# Altium PCB Connected_Cube.PcbDoc (part 3 of 4)
Units mil, origin at the board's own origin, x right, y up, seen from the top; angles counter-clockwise.
Board outline 4960.63 x 3700.79 mil, 4 copper layers (Top Layer, GND, Power, Bottom Layer), stack 47.164 mil thick; 209 components, 203 nets, 946 pads, 737 vias.
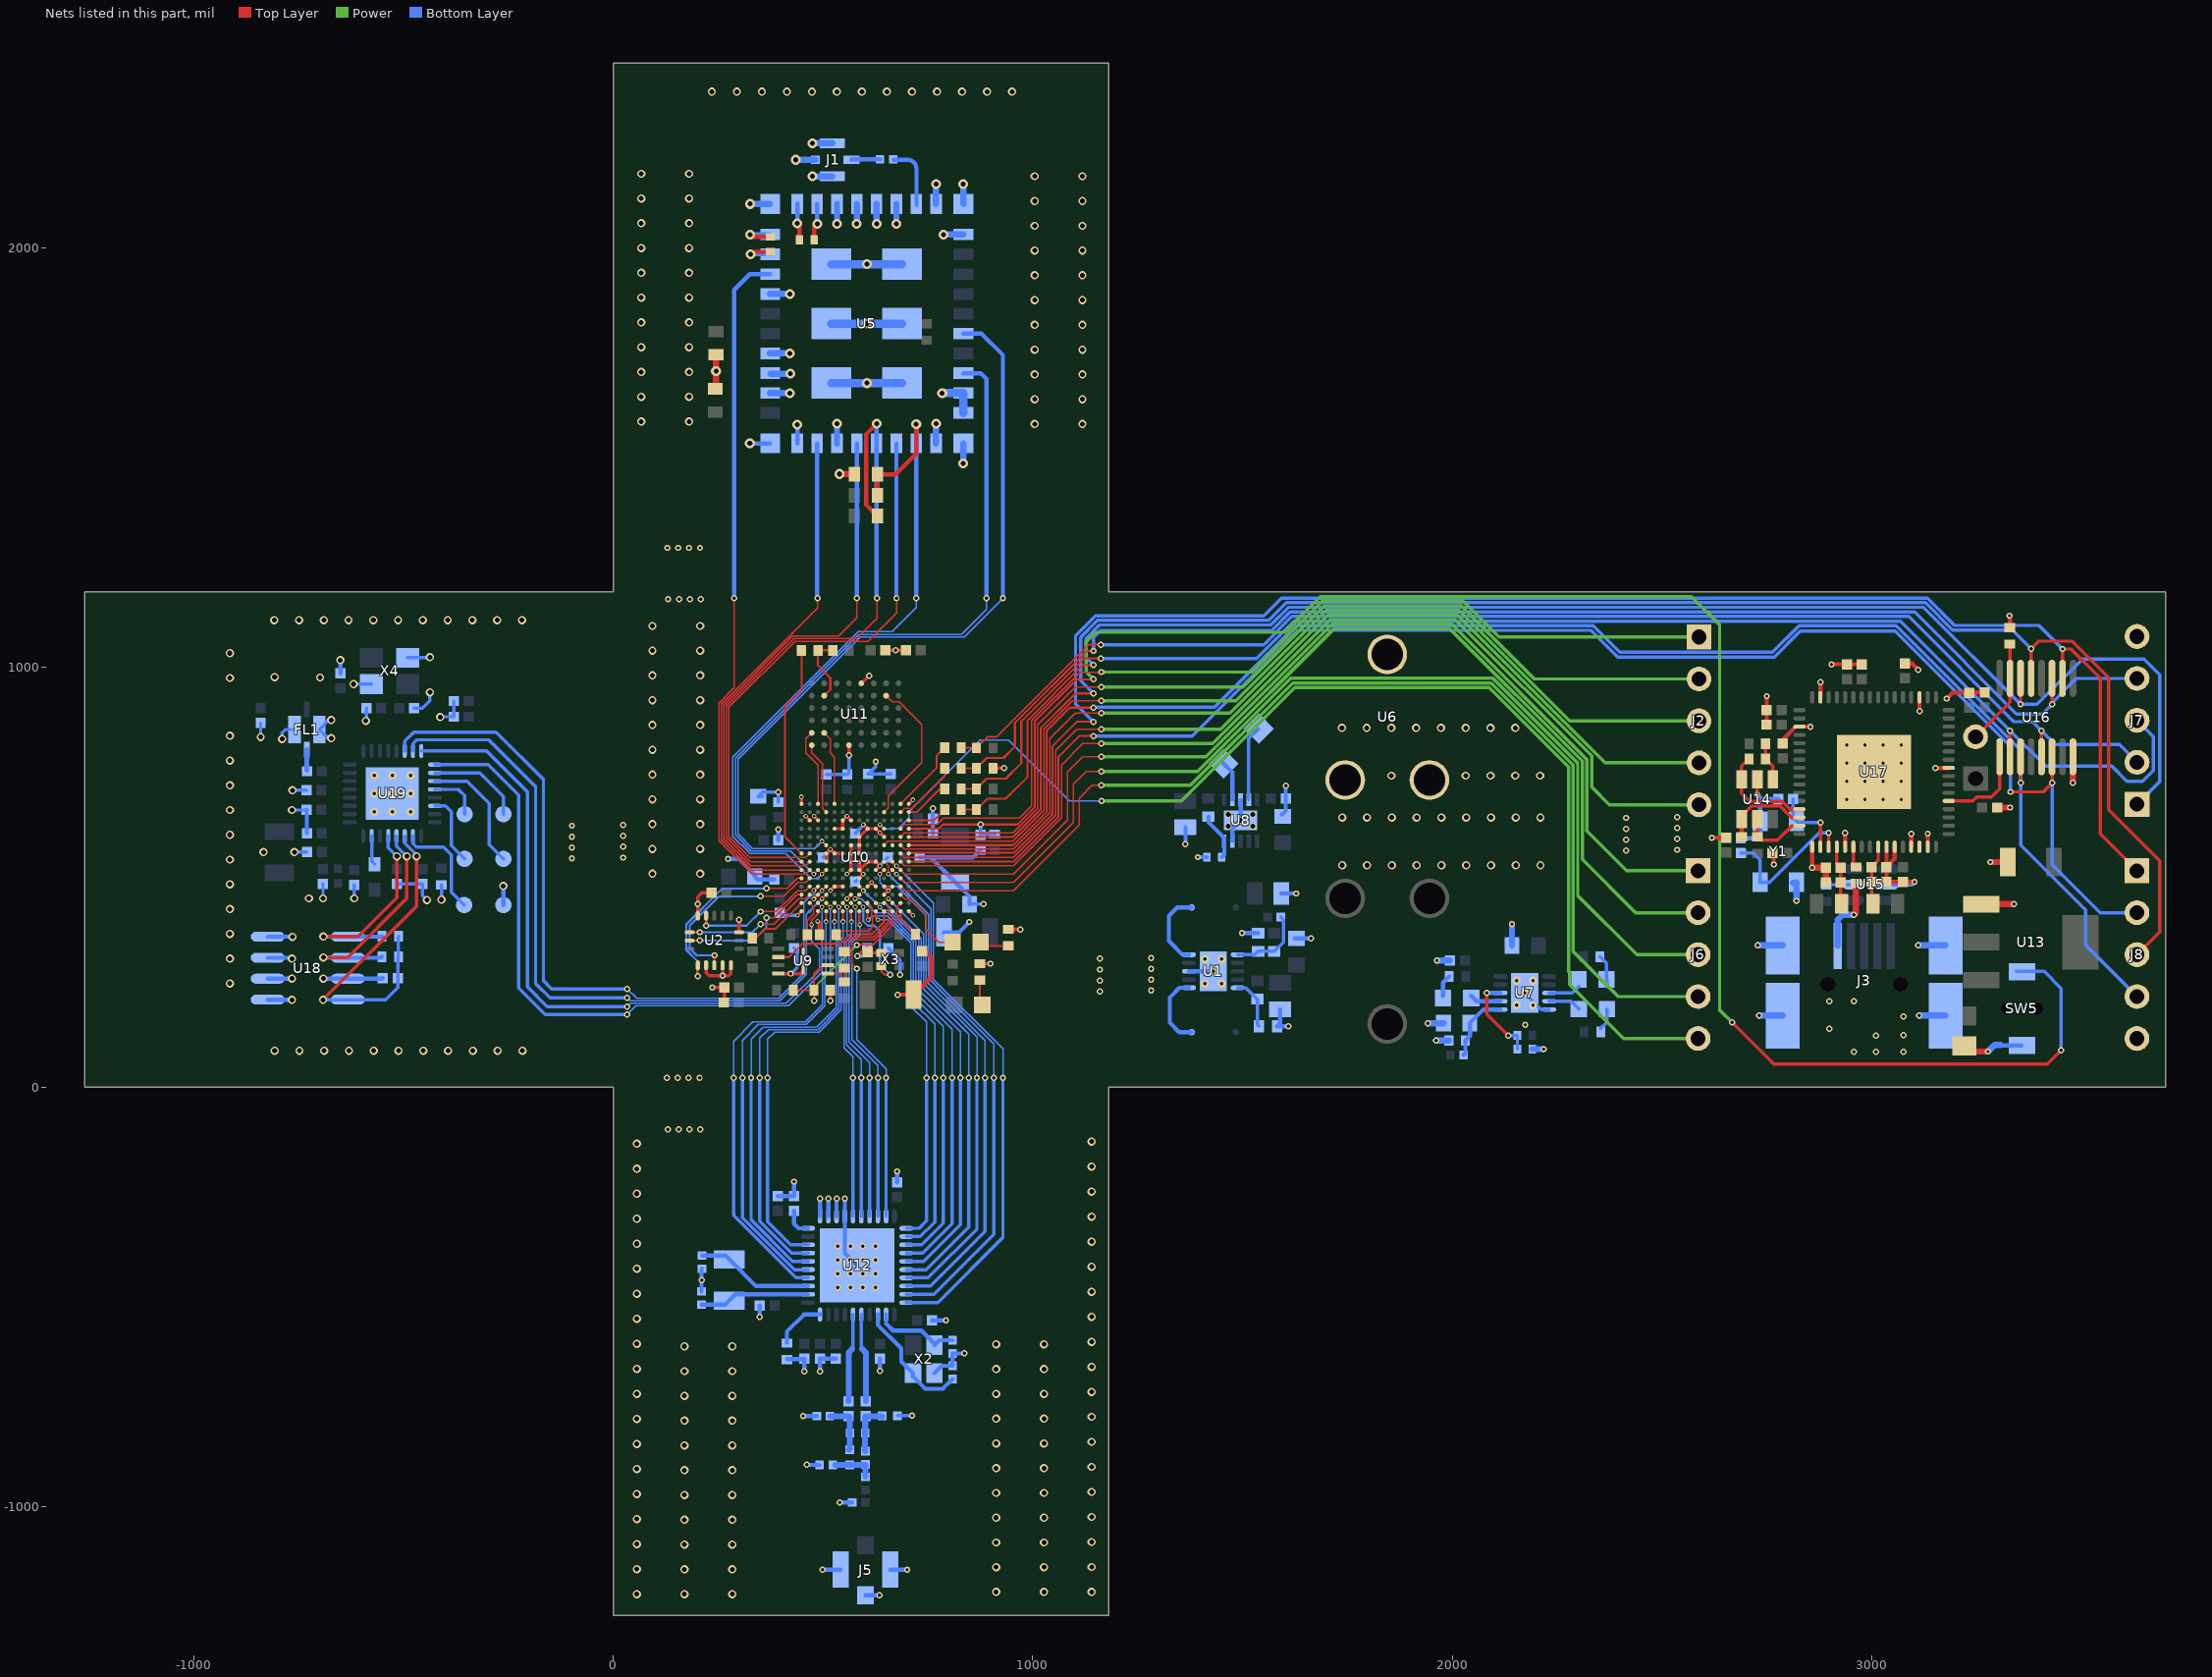
[diagram p5: the nets of this part, all layers, seen from the top]

## Via types
v1: diameter 15, hole 8, Top Layer to Bottom Layer, tented both sides, 313 vias
v2: diameter 19.68, hole 11.81, Top Layer to Bottom Layer, tented both sides, 269 vias
v3: diameter 11, hole 6, Top Layer to Bottom Layer, tented both sides, 78 vias
v4: diameter 23.62, hole 11.81, Top Layer to Bottom Layer, tented both sides, 37 vias
v5: diameter 19.68, hole 7.87, Top Layer to Bottom Layer, tented both sides, 35 vias
v6: diameter 15.75, hole 11.81, Top Layer to Bottom Layer, tented both sides, 5 vias

## Nets (pads, with @x,y where several pads share a name; then routed paths per layer and width w, separated by ;. In a path a pad name is that pad's centre, name@x,y a point inside that pad or via, vN(x,y) a via of type N, cw(c..) or ccw(c..) an arc to the next point about the centre after c; other vN are vias at no path point) (continued)
GND: C1.1 C3.1 C4.1 C5.2 C6.2 C7.1 C8.2 C9.2 C11.2 C12.1 C13.2 C14.1 C15.1 C16.1 C17.1 C18.1 C19.2 C20.1 C21.1 C22.2 C23.1 C24.1 C25.1 C26.1 C27.1 C28.2 C29.1 C30.1 C31.1 C32.1 C33.1 C34.1 C35.2 C36.1 C37.1 C38.1 C39.2 C40.1 C41.2 C42.1 C43.1 C44.1 C45.2 C46.1 C47.1 C48.1 C49.1 C50.1 C51.1 C52.1 C53.1 C54.1 C55.1 C56.1 C57.1 C58.1 C59.2 C61.1 C62.2 C63.2 C64.2 C65.2 C66.1 C67.1 C68.2 C69.2 C70.2 C71.2 C72.2 C73.2 C74.1 C75.2 C76.2 C77.2 C81.1 C82.1 C84.2 C86.1 C87.1 C88.1 C89.1 C91.1 C92.1 C93.1 C94.1 C95.1 C96.1 C97.1 C98.1 C99.1 C100.1 C101.2 C102.2 C103.1 C104.1 FL1.1 FL1.3 J1.2 J1.3 J1.4 J3.5 J3.6 J3.7 J3.8 J3.9 J5.2 J5.3 J5.4 J7.5 J8.5 L6.1 R3.1 R4.1 R8.1 R10.2 R12.1 R14.2 R15.2 R22.2 R23.1 R30.2 R35.2 R36.2 R40.2 R53.2 SW5.2 TP6.1 U1.8 U1.11 U2.5 U2.10 U2.12 U2.13 U2.16 U5.1 U5.9 U5.10 U5.11 U5.16 U5.18 U5.20 U5.21 U5.22 U5.25 U5.31 U5.32 U5.33 U5.34 U5.36 U5.37 U5.38 U5.39 U5.40 U5.41 U5.42 U5.43 U5.44 U5.45 U5.46 U6.1 U6.2 U6.3 U7.5 U7.11 U8.3 U8.9 U8.11 U9.4 U9.9 U10.A1 U10.A14 U10.C2 U10.C3 U10.C6 U10.C7 U10.D5 U10.D6 U10.D9 U10.D10 U10.E8 U10.E11 U10.F7 U10.F8 U10.G4 U10.G5 U10.G6 U10.G7 U10.G8 U10.H4 U10.H7 U10.H8 U10.H9 U10.H10 U10.J7 U10.J8 U10.J10 U10.K8 U10.L3 U10.L5 U10.L6 U10.L9 U10.L10 U10.L11 U10.L12 U10.M3 U10.M7 U10.M11 U10.P1 U10.P14 U11.D1 U11.E6 U12.1 U12.2 U12.3 U12.4 U12.41 U13.1 U14.2 U15.2 U16.8 U17.1 U17.5 U17.10 U17.11 U17.13 U17.15 U17.25 U17.35 U17.47 U17.51 U17.65 U18.1 U18.2 U18.3 U18.4 U18.7 U19.33 X2.2 X3.2 X4.2 X4.4 Y1.2 Y1.4 | length 9572
  Top Layer w5: v3(448.82,691.93) v3(448.82,691.93) ; U10.H8@585.81,538.17 U10.H8@586.65,537.32 ; U10.G8@585.81,556.17 U10.G8@586.65,557.01
  Top Layer w8: U2.5@201.77,408.46 v1(201.77,436.02) 201.77,453.74 211.61,463.58 C7.1@234.25,463.58 ; U2.10@221.46,290.35 221.46,272.64 228.35,265.75 v1(260.83,265.75) ; v1(236.22,237.2) C6.2@264.76,237.2 264.76,202.76 C5.2@263.78,201.77 ; U2.12@260.83,290.35 v1(260.83,265.75) ; U2.13@280.51,290.35 280.51,270.67 275.59,265.75 v1(260.83,265.75) ; U2.16@300.2,369.09 v1(300.2,398.62) ; U9.4@393.7,270.67 v1(423.23,270.67) 445.87,270.67 452.76,277.56 U9.9@452.76,300.2 ; v3(439.01,409.37) U10.P1@448.86,419.21 ; U10.A1@448.86,675.12 v3(448.82,691.93) ; v3(458.7,645.59) U10.C2@468.54,635.75 ; v3@478.38,448.74 U10.M3@488.23,458.58 ; v3@478.38,468.42 U10.L3@488.23,478.27 ; v3@478.38,645.59 U10.C3@488.23,635.75 ; U10.H4@507.91,537.32 U10.G4@507.91,557.01 v3(517.75,566.85) U10.G5@527.6,557.01 U10.G6@547.28,557.01 ; v1(517.72,205.71) R23.1@517.72,231.3 ; v3(517.75,468.42) U10.L5@527.6,478.27 U10.L6@547.28,478.27 ; U10.D5@527.6,616.06 U10.D6@547.28,616.06 U10.C6@547.28,635.75 v3(557.12,645.59) U10.C7@566.97,635.75 ; v3(557.12,448.74) U10.M7@566.97,458.58 ; v3(557.12,507.79) U10.J7@566.97,517.64 U10.H7@566.97,537.32 U10.G7@566.97,557.01 U10.F7@566.97,576.69 ; v1(562.01,791.34) U11.D1@562.01,814.96 ; v1(581.69,312.01) 591.54,321.85 C19.2@606.3,321.85 608.27,319.88 X3.2@638.78,319.88 ; U10.K8@586.65,497.95 v3(596.5,507.79) U10.J8@586.65,517.64 ; U10.H8@586.65,537.32 U10.J8@586.65,517.64 ; U10.G8@586.65,557.01 U10.F8@586.65,576.69 U10.E8@586.65,596.38 596.5,606.22 U10.D9@606.34,616.06 U10.D10@626.02,616.06 U10.E11@645.71,596.38 ; U11.E6@591.54,962.6 592.52,962.6 v1(610.24,980.31) ; v3(596.46,625.98) U10.D9@606.34,616.06 ; U10.L9@606.34,478.27 606.52,478.27 v3(616.25,488) U10.L10@625.98,478.27 ; U10.J10@626.02,517.64 626.46,517.64 v3(635.83,527) 626.02,536.8 U10.H10@626.02,537.32 U10.H9@606.34,537.32 U10.J8@586.65,517.64 ; U10.M11@645.71,458.58 v3@655.55,468.42 ; U10.L11@645.71,478.27 v3@655.55,468.42 ; C47.1@648.62,1041.34 v1(673.23,1041.34) C46.1@697.83,1041.34 ; U10.L12@665.39,478.27 v3@655.55,468.42 ; U10.P14@704.76,419.21 v3(714.61,409.37) ; U10.A14@704.76,675.12 v3(714.61,684.96) ; R36.2@874.02,294.13 v1(899.6,294.13) ; R30.2@905.52,760.16 v1(932.09,760.16) ; R35.2@940.94,376.97 R35.2@941.93,375.98 ; v1(2727.36,696.85) U14.2@2727.36,733.27
  Top Layer w10: v3(487.2,395) 492.13,390.08 R22.2@492.13,363.19 ; v1@678.15,220.47 C41.2@716.54,220.47 758.86,262.8 758.86,308.07 743.11,323.82 C20.1@736.22,323.82 ; R35.2@941.93,375.98 v1(970.47,375.98) ; v1(2619.09,594.49) C59.2@2653.54,594.49 ; C61.1@2750,864.17 C74.1@2750,898.62 v1(2750,932.09) ; v1(2766.73,530.51) C76.2@2766.73,558.07 ; C73.2@2788.39,818.9 2788.39,828.31 2819.33,859.25 U17.51@2827.76,859.25 v1(2854.33,859.25) ; v1(2858.27,522.64) U17.1@2858.27,572.83 ; U17.47@2877.95,929.13 v1(2877.95,965.55) ; v1(2904.53,1007.87) C68.2@2940.94,1007.87 C71.2@2976.38,1007.87 ; U17.5@2937.01,572.83 v1(2937.01,606.3) ; U17.10@3035.43,572.83 C67.1@3035.43,524.61 ; U17.11@3055.12,572.83 3055.12,544.29 C67.1@3035.43,524.61 ; C75.2@3079.72,1009.84 3096.46,1009.84 v1(3111.22,995.08) ; U17.13@3094.49,572.83 v1(3094.49,603.35) ; v1(3102.36,489.17) C77.2@3074.8,489.17 C66.1@3035.43,489.17 C67.1@3035.43,524.61 ; v1(3114.17,896.65) U17.35@3114.17,929.13 ; U17.15@3133.86,572.83 v1(3133.86,604.33) ; v1(3152.56,760.83) U17.25@3184.06,760.83 ; v1(3179.13,926.18) 3192.91,939.96 C69.2@3233.27,939.96 3234.25,940.94 C70.2@3269.68,940.94 ; v1(3328.74,1124.02) 3329.72,1123.03 R14.2@3329.72,1095.47
  Top Layer w15: C86.1@243.11,1664.37 245.08,1666.34 v4(245.08,1706.69) ; v4@245.08,1707.68 C87.1@245.08,1746.06 ; v4(539.37,1461.61) C88.1@573.82,1461.61 ; v1(2858.27,522.64) C65.2@2890.75,522.64 C64.2@2890.75,488.19 ; v1(2957.68,410.43) 2962.6,415.35 R15.2@2962.6,485.24 ; C57.1@3221.46,98.43 3235.24,84.65 v1(3277.56,84.65) ; U13.1@3261.81,436.02 v1(3339.57,436.02) ; v1(3283.46,536.42) C58.1@3324.8,536.42 ; C72.2@3299.21,666.34 v1(3329.72,666.34) ; v1(3480.22,725.3) U16.8@3480.22,787.4
  Bottom Layer w7.87: v2(-840.55,834.65) C91.1@-840.55,867.13 ; v2(-789.37,829.72) -789.37,844.49 -781.5,852.36 FL1.3@-759.84,852.36 ; v2(-765.75,660.43) C97.1@-730.31,660.43 ; v2(-764.76,707.68) C98.1@-730.31,707.68 ; v2@-761.81,562.01 v2(-759.84,560.04) C104.1@-730.31,560.04 ; C100.1@-692.91,484.25 -691.93,483.27 v2(-691.93,449.8) ; v2(-672.24,831.69) -680.12,831.69 FL1.1@-700.79,852.36 -678.15,875 v2(-672.24,875) ; v2(-619.09,960.63) X4.2@-576.77,960.63 ; v2(-617.13,449.8) C92.1@-617.13,482.28 ; v2(-589.57,873.03) -588.58,874.02 C102.2@-588.58,903.54 ; C95.1@-515.75,484.25 C96.1@-454.72,484.25 -454.72,456.69 v2(-443.9,445.87) ; X4.4@-490.16,1023.62 -437.99,1023.62 v2(-437.01,1024.61) ; C101.2@-474.41,903.54 -454.72,903.54 -437.01,921.26 v2(-437.01,940.94) ; v2@-411.42,882.87 C93.1@-379.92,882.87 C94.1@-379.92,920.28 ; v2(-409.45,446.85) R53.2@-409.45,482.28 ; L6.1@677.66,-783.46 v1(712.6,-783.46)
  Bottom Layer w8: C40.1@356.3,692.91 C40.1@345.47,692.91 355.32,702.76 v1(393.7,702.76) C44.1@393.7,679.13 ; C37.1@397.64,415.35 403.62,409.37 v3(439.01,409.37) ; v1(423.23,270.67) 424.05,270.67 437.73,284.35 437.73,325.07 C31.1@431.1,331.69 ; C26.1@500,547.24 517.75,565 v3(517.75,566.85) ; C38.1@507.87,745.08 C39.2@558.07,745.08 562.01,749.02 v1(562.01,791.34) ; C27.1@576.77,490.16 578.86,490.16 v3(596.5,507.79) ; C25.1@576.77,604.33 596.46,624.02 v3(596.46,625.98) ; v1(581.69,312.01) 593.5,312.01 605.32,323.82 C23.1@605.32,331.69 C23.1@605.32,333.66 ; v1(626,775.59) 626,763.8 C33.1@608.27,746.06 C32.1@661.42,746.06 ; v3(635.83,527) 635.83,528.54 C28.2@654.53,547.24 ; C22.2@655.51,331.69 684.06,303.15 v1(684.06,267.72) ; C34.1@849.41,436.02 v1(882.87,436.02) ; v5(2173.23,224.41) U7.11@2192.91,204.72 ; v5(2192.91,194.88) U7.11@2192.91,204.72 ; U7.5@2231.3,185.04 2212.6,185.04 U7.11@2192.91,204.72
  Bottom Layer w10: U18.1@-823.82,208.46 -766.53,208.46 v2(-765.75,207.68) ; U18.2@-823.82,258.46 -766.14,258.46 v2(-765.75,258.86) ; U18.3@-823.82,308.46 -768.11,308.46 v2(-765.75,306.1) ; U18.4@-823.82,358.46 -764.96,358.46 v2(-764.76,358.27) ; C97.1@-731.3,661.42 -730.31,660.43 C103.1@-730.31,605.31 ; v2@-690.55,258.46 U18.7@-632.87,258.46 -550.59,258.46 C89.1@-549.21,259.84 ; C99.1@-650.59,986.22 v2(-650.59,1017.72) ; TP6.1@-261.81,434.06 v2(-261.81,479.33) ; C16.1@210.63,-487.2 v1(210.63,-459.65) 210.63,-434.06 C15.1@211.61,-433.07 ; v1(273.62,544.29) 299.21,544.29 337.6,505.91 C21.1@337.6,501.97 344.49,495.08 C42.1@383.86,495.08 ; v4(325.79,1534.45) U5.45@374.02,1534.45 ; v1(349.41,-548.23) C51.1@349.41,-520.67 ; C48.1@392.72,-259.84 C56.1@431.1,-259.84 v1(431.1,-225.39) ; C43.1@393.7,588.58 v1(393.7,614.17) ; R40.2@414.37,-648.62 453.74,-648.62 455.71,-646.65 v1(455.71,-678.15) v1@455.71,-679.13 ; U5.18@438.98,1534.45 v4@438.98,1577.76 ; v1(452.76,-784.45) C84.2@485.24,-784.45 ; v1(461.61,-900.59) C81.1@492.13,-900.59 ; v1(493.11,-678.15) 493.11,-646.65 494.09,-647.64 C53.1@530.51,-647.64 ; U12.1@493.11,-308.07 v1(493.11,-265.75) ; v1(499.02,-1150.59) J5.2@542.32,-1150.59 ; U12.2@512.8,-308.07 v1(512.8,-265.75) ; U12.3@532.48,-308.07 v1(532.48,-265.75) ; v1(540.35,-990.16) C82.1@569.88,-990.16 ; v1(552.17,-265.75) U12.4@552.17,-308.07 552.17,-395.67 U12.41@581.69,-425.2 ; J5.3@601.38,-1211.61 v1(634.84,-1211.61) ; v1(635.83,-676.18) C55.1@635.83,-647.64 ; J5.4@660.43,-1150.59 v1(700.79,-1150.59) ; C49.1@677.17,-227.36 v1(677.17,-200.79) ; C24.1@730.31,547.24 756.89,547.24 ; C50.1@759.84,-556.1 v1(793.31,-556.1) ; C36.1@761.81,604.33 v1(761.81,664.37) ; X2.2@765.75,-682.09 783.46,-664.37 C18.1@809.06,-664.37 C17.1@809.06,-634.84 v1(837.6,-634.84) ; C30.1@788.39,369.09 824.8,369.09 v1@849.41,393.7 ; C34.1@849.41,436.02 849.41,454.72 C29.1@814.96,489.17 756.89,547.24 ; C45.2@875.98,565.94 857.28,547.24 756.89,547.24 ; v1(1364.17,578.74) C14.1@1364.17,619.09 ; U1.8@1372.56,276.1 v5(1430.63,276.1) ; v1@1394.69,548.23 R12.1@1415.35,548.23 ; U8.9@1476.38,586.61 1476.38,616.14 1496.06,635.83 U8.3@1496.06,685.04 ; v1(1499.02,367.13) R4.1@1537.56,367.13 ; C1.1@1589.57,185.04 1589.57,151.57 R3.1@1582.68,144.68 v1(1609.25,144.68) ; C4.1@1592.52,461.61 v1(1627.95,461.61) ; C12.1@1594.49,649.61 1603.35,658.46 C13.2@1603.35,687.99 v1(1603.35,718.5) ; C3.1@1624.09,354.33 C3.1@1629.09,354.33 v1(1663.46,354.33) ; C62.2@2687.99,593.5 2720.47,593.5 2734.25,607.28 Y1.4@2734.25,633.86 2734.25,689.96 ; v1(2727.36,696.85) 2734.25,689.96 ; C63.2@2777.56,687.01 2737.2,687.01 2734.25,689.96 ; U15.2@3039.37,482.68 3095.87,482.68 v1(3102.36,489.17) ; 3308.07,100.39 3309.06,99.41 SW5.2@3357.28,99.41
  Bottom Layer w15: v4(326.77,2105.32) U5.46@374.02,2105.32 ; U5.20@374.02,1654.53 v4(421.26,1654.53) ; U5.22@374.02,1749.02 v4(421.26,1749.02) ; U5.25@374.02,1890.75 v4(421.26,1890.75) ; U5.21@375,1700.79 v4(422.24,1700.79) ; v4(435.04,2210.63) J1.4@482.28,2210.63 ; v4(475.39,2171.26) J1.2@522.64,2171.26 ; v4(475.39,2250) J1.3@522.64,2250 ; U5.16@533.46,1534.45 v4(533.46,1581.69) ; v4(533.46,2058.07) U5.31@533.46,2105.32 ; v4(580.71,2058.07) U5.32@580.71,2105.32 ; v4(627.95,2058.07) U5.33@627.95,2105.32 ; v4(675.2,2058.07) U5.34@675.2,2105.32 ; U5.11@769.69,1534.45 v4(769.68,1581.69) ; U5.36@769.69,2105.32 v4(769.68,2152.56) ; v4(787.4,2032.48) U5.1@834.65,2032.48 ; v4(834.65,1487.2) U5.44@834.65,1534.45 ; U5.43@834.65,2105.32 v4(834.65,2152.56) ; v1(1941.93,152.32) C11.2@1979.33,152.32 ; v1(1961.61,110.98) R8.1@1992.13,110.98 ; v1(1963.58,302.17) C8.2@1995.08,302.17 ; C9.2@2142.72,337.6 v1(2142.72,388.78) ; R10.2@2190.94,90.55 v1(2218.5,90.55) ; v1(2728.35,337.6) J3.8@2788.38,337.6 ; v1(2732.28,170.28) J3.9@2788.38,170.28 ; Y1.2@2812.99,487.2 Y1.2@2813.98,486.22 ; v1(2820.87,443.9) Y1.2@2820.87,488.19 ; J3.5@2919.29,336.61 2919.29,398.62 2931.1,410.43 v1(2957.68,410.43) ; v1(3111.22,337.6) J3.6@3176.18,337.6 ; v1(3113.19,170.28) J3.7@3176.18,170.28 ; v1(3277.56,84.65) 3293.31,100.39 3308.07,100.39
  Bottom Layer w20: U5.42@519.69,1678.15 U5.39@688.98,1678.15 ; U5.41@519.69,1819.88 U5.38@688.98,1819.88 ; U5.40@519.69,1961.61 U5.37@688.98,1961.61 ; v4(784.45,1654.53) U5.9@834.65,1654.53 U5.10@834.65,1607.28
  other v1: 535.43,-477.36 565.29,-477.36 595.14,-477.36 625,-477.36 535.43,-444.55 565.29,-444.55 595.14,-444.55 625,-444.55 535.43,-411.75 564.96,-411.75 595.47,-411.75 625,-411.75 535.43,-378.94 565.29,-378.94 595.14,-378.94 625,-378.94 129.92,-100.39 155.9,-100.39 181.89,-100.39 207.87,-100.39 127.95,21.65 153.94,21.65 179.92,21.65 205.9,21.65 2957.68,83.66 3010.83,83.66 3075.79,83.66 3010.83,123.03 3075.79,124.02 2899.61,138.78 2174.21,148.62 3075.79,168.31 2899.61,204.72 2957.68,204.72 678.15,219.49 1160.43,228.15 1282.48,230.12 1160.43,254.14 1282.48,256.1 1160.43,280.12 1282.48,282.09 1160.43,306.1 1282.48,308.07 848.43,393.7 -98.43,545.08 23.62,547.05 1393.7,548.23 2414.37,563.78 2536.42,565.75 -98.43,571.06 23.62,573.03 2414.37,589.77 2536.42,591.73 -98.43,597.05 23.62,599.02 2414.37,615.75 2536.42,617.72 -98.43,623.03 23.62,625 2414.37,641.73 2536.42,643.7 130.91,1163.39 156.89,1163.39 182.87,1163.39 208.86,1163.39 128.94,1285.43 154.92,1285.43 180.9,1285.43 206.89,1285.43
  other v2: 56.1,-1208.66 169.95,-1208.66 283.79,-1208.66 913.06,-1203.74 1026.9,-1203.74 1140.75,-1203.74 56.1,-1149 169.95,-1149.61 283.79,-1149.61 913.06,-1144.69 1026.9,-1144.69 1140.75,-1144.08 169.95,-1090.55 283.79,-1090.55 56.1,-1089.35 913.06,-1085.63 1026.9,-1085.63 1140.75,-1084.43 169.95,-1031.5 283.79,-1031.5 56.1,-1029.69 913.06,-1026.57 1026.9,-1026.57 1140.75,-1024.77 169.95,-972.44 283.79,-972.44 56.1,-970.04 913.06,-967.52 1026.9,-967.52 1140.75,-965.11 169.95,-913.39 283.79,-913.39 56.1,-910.38 913.06,-908.46 1026.9,-908.46 1140.75,-905.46 169.95,-854.33 283.79,-854.33 56.1,-850.72 913.06,-849.41 1026.9,-849.41 1140.75,-845.8 169.95,-795.28 283.79,-795.28 56.1,-791.07 913.06,-790.35 1026.9,-790.35 1140.75,-786.14 169.95,-736.22 283.79,-736.22 56.1,-731.41 913.06,-731.3 1026.9,-731.3 1140.75,-726.49 169.95,-677.17 283.79,-677.17 913.06,-672.24 1026.9,-672.24 56.1,-671.75 1140.75,-666.83 169.95,-618.11 283.79,-618.11 913.06,-613.19 1026.9,-613.19 56.1,-612.1 1140.75,-607.17 56.1,-552.44 1140.75,-547.52 56.1,-492.78 1140.75,-487.86 56.1,-433.13 1140.75,-428.2 56.1,-373.47 1140.75,-368.55 56.1,-313.81 1140.75,-308.89 56.1,-254.16 1140.75,-249.23 56.1,-194.5 1140.75,-189.58 56.1,-134.84 1140.75,-129.92 -807.09,86.61 -748.03,86.61 -688.98,86.61 -629.92,86.61 -570.87,86.61 -511.81,86.61 -452.76,86.61 -393.7,86.61 -334.65,86.61 -275.59,86.61 -216.54,86.61 -913.7,247.05 -690.94,258.86 -913.7,306.1 -913.7,365.16 -913.7,424.21 -725.39,449.8 -913.7,483.27 93.5,508.86 207.35,508.86 1738.19,528.87 1797.24,528.87 1856.3,528.87 1915.35,528.87 1974.41,528.87 2033.46,528.87 2092.52,528.87 2151.57,528.87 2210.63,528.87 -913.7,542.32 -833.66,560.04 93.5,567.91 207.35,567.91 -913.7,601.38 93.5,626.97 207.35,626.97 1738.19,642.72 1797.24,642.72 1856.3,642.72 1915.35,642.72 1974.41,642.72 2033.46,642.72 2092.52,642.72 2151.57,642.72 2210.63,642.72 -913.7,660.43 93.5,686.02 207.35,686.02 -913.7,719.49 1855.31,742.45 2032.48,742.45 2091.54,742.45 2150.59,742.45 2209.65,742.45 93.5,745.08 207.35,745.08 -913.7,778.54 93.5,804.13 207.35,804.13 -913.7,837.6 1737.2,856.3 1796.26,856.3 1855.31,856.3 1914.37,856.3 1973.43,856.3 2032.48,856.3 2091.54,856.3 2150.59,856.3 93.5,863.19 207.35,863.19 -412.4,881.89 93.5,922.24 207.35,922.24 -913.7,975.39 -698.82,976.38 -807.09,977.36 93.5,981.3 207.35,981.3 -913.7,1034.45 93.5,1040.35 207.35,1040.35 93.5,1099.41 207.35,1099.41 -808.07,1113.19 -749.02,1113.19 -689.96,1113.19 -630.91,1113.19 -571.85,1113.19 -512.8,1113.19 -453.74,1113.19 -394.68,1113.19 -335.63,1113.19 -276.57,1113.19 -217.52,1113.19 1004.88,1580.8 1118.72,1580.8 66.89,1586.7 180.73,1586.7 1004.88,1639.85 1118.72,1639.85 66.89,1645.76 180.73,1645.76 1004.88,1698.91 1118.72,1698.91 66.89,1704.81 180.73,1704.81 1004.88,1757.96 1118.72,1757.96 66.89,1763.87 180.73,1763.87 1004.88,1817.02 1118.72,1817.02 66.89,1822.92 180.73,1822.92 1004.88,1876.07 1118.72,1876.07 66.89,1881.98 180.73,1881.98 1004.88,1935.13 1118.72,1935.13 66.89,1941.03 180.73,1941.03 1004.88,1994.18 1118.72,1994.18 66.89,2000.09 180.73,2000.09 1004.88,2053.24 1118.72,2053.24 66.89,2059.14 180.73,2059.14 1004.88,2112.29 1118.72,2112.29 66.89,2118.2 180.73,2118.2 1004.88,2171.35 1118.72,2171.35 66.89,2177.25 180.73,2177.25 235.07,2373.03 294.73,2373.03 354.39,2373.03 414.04,2373.03 473.7,2373.03 533.36,2373.03 593.01,2373.03 652.67,2373.03 712.33,2373.03 771.98,2373.03 831.64,2373.03 891.29,2373.03 950.95,2373.03
  other v3: 478.38,448.5 655.55,468 478.38,468.5 635.79,606.34 479,645.59
  other v4: 438.98,1578.74 605.32,1678.15 605.32,1819.88 605.32,1961.61
  other v5: 2153.54,194.88 1410.94,246.57 1450.31,246.57 2153.54,253.94 2192.91,253.94 1410.94,305.63 1450.31,305.63 -569.88,656.5 -526.58,656.5 -483.27,656.5 2940.95,686.02 2984.25,686.02 3027.56,686.02 3070.87,686.02 -569.88,699.8 -526.58,699.8 -483.27,699.8 2940.95,729.33 2984.25,729.33 3027.56,729.33 3070.87,729.33 -569.88,743.11 -526.58,743.11 -483.27,743.11 2940.95,772.64 2984.25,772.64 3027.56,772.64 3070.87,772.64 2940.95,815.94 2984.25,815.94 3027.56,815.94 3070.87,815.94
  other v6: 1466.04,622.05 1525.1,622.05 1495.57,635.83 1466.04,649.61 1525.1,649.61
HARD_TCK: J7.4 R30.1 R31.1 U16.11 | length 3209.1
  Top Layer w5: R31.1@829.73,760.16 R30.1@866.14,760.16 890.43,784.45 930.12,784.45 957.68,812.01 957.68,868.01 1129.43,1039.76 v1(1144.68,1039.76)
  Top Layer w8: v1(3430.22,912.3) U16.11@3430.22,974.41
  Bottom Layer w8: v1(1144.68,1039.76) 1144.68,1071.85 1161.42,1088.58 1569.51,1088.58 1613.66,1132.74 3102.5,1132.74 3345.47,889.76 3407.68,889.76 v1(3430.22,912.3) 3430.22,916.27 3488.16,974.21 J7.4@3632.87,974.21
HARD_TDI: J7.2 R29.1 R32.1 U16.5 | length 3138.5
  Top Layer w5: R32.1@829.72,809.53 867.13,809.53 892.24,834.65 913,834.65 1132.88,1054.53 v1(1162.4,1054.53)
  Top Layer w8: U16.5@3405.22,787.4 v1(3405.22,849.51)
  Bottom Layer w8: v1(1162.4,1054.53) 1551.01,1054.53 1618.22,1121.74 3088.89,1121.74 3339.57,871.06 3383.66,871.06 v1(3405.22,849.51) 3438.19,816.54 3590.55,816.54 J7.2@3632.87,774.21
HARD_TDO: J7.1 R28.1 R33.1 U16.14 | length 3748
  Top Layer w5: R33.1@829.73,661.42 R28.1@866.14,661.42 891.73,687.01 935.04,687.01 987.85,739.82 987.85,874.18 1119.63,1005.96 v1(1144.68,1005.96)
  Top Layer w8: v1(3355.22,912.3) U16.14@3355.22,974.41
  Bottom Layer w8: v1(1144.68,1005.96) 1126.97,1023.68 1126.97,1069.69 1159.05,1101.77 1567.14,1101.77 1609.11,1143.74 3123.78,1143.74 v1(3355.22,912.3) 3394.59,912.3 3502.95,1020.67 3649.61,1020.67 3687.01,983.27 3687.01,728.35 J7.1@3632.87,674.21
HARD_TMS: J7.3 R27.1 R34.1 U16.2 | length 3431.9
  Top Layer w5: R34.1@829.73,710.79 R27.1@866.14,710.79 890.59,735.24 936.02,735.24 973.08,772.3 973.08,872.1 1122.89,1021.91 v1(1162.4,1021.91)
  Top Layer w8: U16.2@3330.22,787.4 v1(3330.22,849.9)
  Bottom Layer w8: v1(1162.4,1021.91) 1533.95,1021.91 1622.78,1110.74 3069.38,1110.74 v1(3330.22,849.9) 3415.35,764.76 3572.83,764.76 3608.27,729.33 3645.67,729.33 3671.26,754.92 3671.26,835.83 J7.3@3632.87,874.21
INT1: U2.11 U10.K2 | length 476.8
  Top Layer w3: v1(351.38,454.72) 406.5,454.72 439.96,488.19 458.78,488.19 U10.K2@468.54,497.95
  Top Layer w5: U2.11@241.14,290.35 v1(241.14,313.98)
  Bottom Layer w5: v1(241.14,313.98) 198.82,313.98 182.1,330.69 182.1,384.37 252.46,454.72 v1(351.38,454.72)
INT2: U2.9 U10.K1 | length 480.4
  Top Layer w3: v1(365.16,473.43) 414.37,473.43 438.9,497.95 U10.K1@448.86,497.95
  Top Layer w5: v1(201.77,264.76) U2.9@201.77,290.35
  Bottom Layer w5: v1(201.77,264.76) 201.77,299.21 174.1,326.88 174.1,387.69 259.84,473.43 v1(365.16,473.43)
IO0: J6.4 U10.L13 | length 2717.9
  Top Layer w3: U10.L13@685.08,478.27 694.84,468.5 954.53,468.5 1110.57,624.55 1110.57,688.33 1141.73,719.49 v1(1163.39,719.49)
  Top Layer w5: U10.L13@685.08,477.88 U10.L13@685.08,478.27
  Power w8: v1(1163.39,719.49) 1376.18,719.49 1620.1,963.41 2092.5,963.41 2288.56,767.35 2288.56,323.45 2396.26,215.75 J6.4@2586.52,215.75
IO1: J6.1 U10.H13 | length 2560.9
  Top Layer w3: U10.H13@685.08,537.32 694.84,527.56 954.19,527.56 1068.57,641.95 1068.57,767.72 1119.76,818.9 v1(1163.39,818.9)
  Power w8: v1(1163.39,818.9) 1428.92,818.9 1713.31,1103.29 1999.29,1103.29 2321.56,781.02 2321.56,610.53 2416.34,515.75 J6.1@2586.52,515.75
IO2: J6.3 U10.K13 | length 2618
  Top Layer w3: U10.K13@685.08,497.95 694.84,488.19 954.41,488.19 1096.57,630.35 1096.57,721.57 1126.97,751.97 v1(1163.39,751.97)
  Power w8: v1(1163.39,751.97) 1393.1,751.97 1615.54,974.41 2097.06,974.41 2299.56,771.91 2299.56,456.35 2440.16,315.75 J6.3@2586.52,315.75
IO3: U10.H12 U12.20 | length 1299.6
  Top Layer w5: U10.H12@665.39,537.32 665.39,536.8 v3(675.2,527)
  Bottom Layer w3: v3(675.2,527) 763.78,438.42 763.78,255.91 929.13,90.55 v1(929.13,21.61)
  Bottom Layer w8: U12.20@698.82,-513.78 773.62,-513.78 929.13,-358.27 v1(929.13,21.61)
IO4: U10.N12 U12.16 | length 1066.9
  Top Layer w3: U10.N12@665.39,438.9 U10.N12@665.9,438.9
  Top Layer w5: v3(655.55,448.74) U10.N12@665.39,438.9
  Bottom Layer w3: v3(655.55,448.74) 739.78,364.51 739.78,233.65 847.44,125.98 v1(847.44,21.61)
  Bottom Layer w8: U12.16@698.82,-435.04 746.06,-435.04 847.44,-333.66 v1(847.44,21.61)
IO5: U10.P12 U12.9 | length 829.5
  Top Layer w3: v1(580.71,282.48) 568.48,294.71 568.48,346.04 573.61,351.17 621.53,351.17 665.35,395 665.35,401.57 665.39,401.61 U10.P12@665.39,419.21
  Bottom Layer w3: v1(580.71,282.48) 580.71,113.19 650.59,43.31 v1(650.59,21.61)
  Bottom Layer w8: U12.9@650.59,-308.07 v1(650.59,21.61)
IO6: U10.N10 U12.14 | length 986.6
  Top Layer w5: U10.N10@626.02,438.9 v3@635.79,429.13
  Bottom Layer w3: v3(635.83,429) 643.47,421.35 658,421.35 727.78,351.57 727.78,217.9 808.07,137.61 v1(808.07,21.61)
  Bottom Layer w8: U12.14@698.82,-395.67 738.19,-395.67 808.07,-325.79 v1(808.07,21.61)
IO7: U10.P10 U12.11 | length 857.8
  Top Layer w5: U10.P10@626.02,419.21 626.02,403.5 v3(630.91,398.62)
  Bottom Layer w3: v3(630.91,398.62) 654.79,398.62 709.78,343.63 709.78,192.31 747.05,155.04 v1(747.05,21.61)
  Bottom Layer w8: U12.11@698.82,-336.61 729.33,-336.61 747.05,-318.9 v1(747.05,21.61)
IO8: U10.P9 U12.12 | length 930.2
  Top Layer w5: U10.P9@606.34,419.21 606.34,400.55 v3(608.27,398.62)
  Bottom Layer w3: v3(608.27,398.62) 618.27,408.62 653.27,408.62 715.78,346.12 715.78,201.54 766.73,150.59 v1(766.73,21.61)
  Bottom Layer w8: U12.12@698.82,-356.3 732.28,-356.3 766.73,-321.85 v1(766.73,21.61)
IO9: U10.L8 U12.15 | length 1084.6
  Top Layer w3: U10.L8@586.65,478.27 v3(596.5,468.42)
  Bottom Layer w3: v3(596.5,468.42) 625.96,438.96 626.01,439 648.84,439 733.78,354.06 733.78,225.77 827.76,131.8 v1(827.76,21.61)
  Bottom Layer w8: U12.15@698.82,-415.35 740.16,-415.35 827.76,-327.76 v1(827.76,21.61)
IO10: U10.M8 U12.13 | length 1009.6
  Top Layer w5: v3(576.81,448.74) U10.M8@586.65,458.58
  Bottom Layer w3: v3(576.81,448.74) 591.62,448.74 625,415.35 655.51,415.35 721.78,349.09 721.78,210.02 786.42,145.39 v1(786.42,21.61)
  Bottom Layer w8: U12.13@698.82,-375.98 735.24,-375.98 786.42,-324.8 v1(786.42,21.61)
IO11: U10.P8 U12.8 | length 762.1
  Top Layer w5: U10.P8@586.65,419.21 586.65,388.16 v3(588,386.81)
  Bottom Layer w3: v3(588,386.81) 588,362 587.15,362 568.71,343.55 568.71,113.38 630.91,51.18 v1(630.91,21.61)
  Bottom Layer w8: U12.8@630.91,-308.07 v1(630.91,21.61)
IO12: U10.N7 U12.7 | length 778.5
  Top Layer w5: U10.N7@566.97,438.9 v3(576.77,429.13)
  Bottom Layer w3: v3(576.77,429.13) 578,427.91 578,361.33 562.01,345.34 562.01,107.28 611.22,58.07 v1(611.22,21.61)
  Bottom Layer w8: U12.7@611.22,-308.07 v1(611.22,21.61)
IO13: U10.P7 U12.6 | length 747
  Top Layer w5: v3@566.97,394.72 U10.P7@566.97,419.21
  Bottom Layer w3: v3(568,394.72) 568,359.81 556.01,347.82 556.01,100.49 591.54,64.96 v1(591.54,21.61)
  Bottom Layer w8: U12.6@591.54,-308.07 v1(591.54,21.61)
IO14: U10.N6 U12.5 | length 763.4
  Top Layer w5: U10.N6@547.28,438.9 v3(557.09,429.13)
  Bottom Layer w3: v3(557.09,429.13) 557.6,428.62 557.6,357.9 550.01,350.31 550.01,93.69 571.85,71.85 v1(571.85,21.61)
  Bottom Layer w8: U12.5@571.85,-308.07 v1(571.85,21.61)
IO15: U10.P6 U12.38 | length 995.4
  Top Layer w5: v3@547.28,394.72 U10.P6@547.28,419.21
  Bottom Layer w3: v1(368.11,21.61) 368.11,114.17 385.07,131.13 490.39,131.13 544.01,184.76 544.01,352.79 547.6,356.39 v3(547.6,394.72)
  Bottom Layer w8: v1(368.11,21.61) 368.11,-320.87 423.23,-375.98 U12.38@464.57,-375.98
IO16: U10.N5 U12.37 | length 1056.5
  Top Layer w5: U10.N5@527.6,438.9 v3@537.36,429.13
  Bottom Layer w3: v1(349.41,21.61) 349.41,116.46 370.08,137.13 487.9,137.13 537.6,186.83 537.6,428.73 v3(538,429.13)
  Bottom Layer w8: v1(349.41,21.61) 349.41,-319.88 425.2,-395.67 U12.37@464.57,-395.67
IO17: U10.P5 U12.36 | length 1072.8
  Top Layer w5: v3(527.6,394.72) U10.P5@527.6,419.21
  Bottom Layer w3: v1(328.74,21.61) 328.74,114.17 357.7,143.13 461.61,143.13 485.42,143.13 531.6,189.32 531.6,374.02 527.6,378.02 v3(527.6,394.72)
  Bottom Layer w8: v1(328.74,21.61) 328.74,-316.14 427.96,-415.35 U12.36@464.57,-415.35
IO18: U10.L4 U19.14 | length 1790.3
  Top Layer w5: v3(498.07,468.42) U10.L4@507.91,478.27
  Bottom Layer w3: v1(33.46,234.25) 56.1,211.61 394.69,211.61 454.72,271.65 454.72,439.96 473.26,458.5 488.15,458.5 v3(498.07,468.42)
  Bottom Layer w8: U19.14@-497.05,801.18 -497.05,824.8 -475.39,846.46 -279.53,846.46 -166.34,733.27 -166.34,253.94 -146.65,234.25 v1(33.46,234.25)
IO19: U10.M4 U19.15 | length 1727.7
  Top Layer w5: v3(498.07,448.74) U10.M4@507.91,458.58
  Bottom Layer w3: v1(33.46,212.6) 40.45,205.61 397.17,205.61 460.72,269.17 460.72,411.39 v3(498.07,448.74)
  Bottom Layer w8: U19.15@-477.36,801.18 -477.36,818.9 -468.5,827.76 -296.26,827.76 -185.04,716.54 -185.04,246.66 -150.97,212.6 v1(33.46,212.6)
IO20: U10.N4 U12.35 | length 1115.5
  Top Layer w5: U10.N4@507.91,438.9 v3@517.68,429.13
  Bottom Layer w3: v1(308.07,21.61) 308.07,111.22 345.98,149.13 460.21,149.13 504.92,193.85 504.92,263.78 517.72,276.57 517.72,390.17 517.6,390.28 517.6,409.15 ; 517.6,409.45 517.6,428.83 v3(517.9,429.13)
  Bottom Layer w8: v1(308.07,21.61) 308.07,-311.02 432.09,-435.04 U12.35@464.57,-435.04
IO21: U10.P4 U12.34 | length 1128
  Top Layer w5: v3@507.91,394.72 U10.P4@507.91,419.21
  Bottom Layer w3: v1(287.4,21.61) 287.4,109.25 333.28,155.13 457.72,155.13 498.92,196.33 498.92,266.26 507.5,274.84 v3(507.5,394.72)
  Bottom Layer w8: v1(287.4,21.61) 287.4,-305.91 436.22,-454.72 U12.34@464.57,-454.72
IO22: U10.N3 U19.17 | length 1649.7
  Top Layer w5: U10.N3@488.23,438.9 v3@497.99,429.13
  Bottom Layer w3: v1(33.46,173.23) 53.85,193.61 417.79,193.61 497.5,273.33 v3(497.5,429.13)
  Bottom Layer w8: U19.17@-425.2,768.7 -298.23,768.7 -225.39,695.87 -225.39,236.22 -162.4,173.23 v1(33.46,173.23)
IO23: U10.P3 U19.16 | length 1664
  Top Layer w5: v3(473,386.81) 473,398.14 488.23,413.37 U10.P3@488.23,419.21
  Bottom Layer w3: v1(33.46,191.93) 41.15,199.61 412.21,199.61 491.5,278.9 491.5,328.74 473,347.24 v3(473,386.81)
  Bottom Layer w8: U19.16@-457.68,801.18 -302.17,801.18 -204.72,703.74 -204.72,239.17 -157.48,191.93 v1(33.46,191.93)
IO24: C88.2 R49.1 U5.12 U10.J4 | length 1719
  Top Layer w5: v3(498.07,507.79) U10.J4@507.91,517.64
  Top Layer w10: R49.1@629.92,1410.43 C88.2@629.92,1460.63 673.23,1460.63 722.44,1509.84 v4(722.44,1580.71)
  Bottom Layer w3: v3(498.07,507.79) 487.32,497.05 471.46,497.05 411.61,556.9 326.72,556.9 285.24,598.38 285.24,786.47 584.41,1085.63 665.35,1085.63 722.44,1142.72 v1(722.44,1165.35)
  Bottom Layer w10: v1(722.44,1165.35) U5.12@722.44,1534.45 ; U5.12@722.44,1533.46 v4(722.44,1580.71)
IO25: U5.8 U10.J3 | length 1778.3
  Top Layer w5: v3(478.38,507.79) U10.J3@488.23,517.64
  Bottom Layer w3: v3(478.38,507.79) 423.28,562.9 329.21,562.9 291.24,600.86 291.24,783.98 586.1,1078.83 829.82,1078.83 889.76,1138.78 v1(889.76,1165.35)
  Bottom Layer w10: U5.8@834.65,1701.77 875.98,1701.77 889.76,1687.99 v1(889.76,1165.35)
IO26: U5.26 U10.J2 | length 1683.4
  Top Layer w3: v1(288.39,1165.35) 288.39,952.25 251.59,915.45 251.59,587.5 331.22,507.87 458.78,507.87 U10.J2@468.54,517.64
  Bottom Layer w10: v1(288.39,1165.35) 288.39,1900.59 325.79,1937.99 U5.26@374.02,1937.99
IO27: U5.17 U10.J1 | length 1261.2
  Top Layer w3: U10.J1@448.86,517.64 329.94,517.64 257.59,589.99 257.59,912.97 487.2,1142.58 v1(487.2,1165.35)
  Bottom Layer w10: U5.17@486.22,1534.45 486.22,1166.34 v1(487.2,1165.35)
IO28: U5.13 U10.G2 | length 1422.7
  Top Layer w3: U10.G2@468.54,557.01 459.12,547.59 325.44,547.59 275.59,597.44 275.59,905.51 433.07,1062.99 608.27,1062.99 675.2,1129.92 v1(675.2,1165.35)
  Bottom Layer w10: v1(675.2,1165.35) U5.13@675.2,1534.45
IO29: U10.H11 U12.18 | length 1223.5
  Top Layer w3: U10.H11@645.71,537.32 655.51,527.52 v3(655.51,507.79)
  Bottom Layer w3: v3(655.51,507.79) 751.78,411.53 751.78,246.25 886.81,111.22 v1(886.81,21.61)
  Bottom Layer w8: U12.18@698.82,-474.41 756.89,-474.41 886.81,-344.49 v1(886.81,21.61)
IO30: U5.15 U10.H2 | length 1373.4
  Top Layer w3: U10.H2@468.54,537.32 458.78,527.56 328.5,527.56 263.59,592.47 263.59,910.48 428.1,1074.99 537.59,1074.99 580.71,1118.11 v1(580.71,1165.35)
  Bottom Layer w10: v1(580.71,1165.35) U5.15@580.71,1534.45
IO31: R48.1 U5.14 U10.H1 | length 1668.8
  Top Layer w3: U10.H1@448.86,537.32 327.22,537.32 269.59,594.96 269.59,908 430.59,1068.99 580.8,1068.99 628.94,1117.13 v1(628.94,1165.35)
  Top Layer w10: v4(627.95,1581.69) 603.35,1557.09 603.35,1387.8 R48.1@629.92,1361.22
  Bottom Layer w10: v4(627.95,1581.69) U5.14@627.95,1534.45 627.95,1166.34 v1(628.94,1165.35)
IO32: J2.5 U10.G13 | length 2458.9
  Top Layer w3: U10.G13@685.08,557.01 694.92,547.17 953.99,547.17 1054.57,647.75 1054.57,802.17 1105.76,853.35 v1(1163.39,853.35)
  Power w8: v1(1163.39,853.35) 1447.81,853.35 1708.75,1114.29 2007.76,1114.29 2332.56,789.49 2332.56,715.55 2375.11,673 J2.5@2588.47,673
IO33: J2.2 U10.E13 | length 2320.5
  Top Layer w3: U10.E13@685.08,596.38 694.5,605.8 953.23,605.8 1011.85,664.41 1011.85,863.62 1101.97,953.74 v1(1163.39,953.74)
  Power w8: v1(1163.39,953.74) 1501.53,953.74 1695.08,1147.29 2021.42,1147.29 2195.72,973 J2.2@2588.47,973
IO34: U5.6 U10.F4 | length 1900.8
  Top Layer w5: v3(498.07,586.54) U10.F4@507.91,576.69
  Bottom Layer w3: v3(498.07,586.54) 480.43,568.9 331.69,568.9 297.24,603.35 297.24,781.5 588.58,1072.83 836.61,1072.83 v1(929.13,1165.35)
  Bottom Layer w10: U5.6@834.65,1796.26 877.95,1796.26 929.13,1745.08 v1(929.13,1165.35)
IO35: U10.J12 U12.19 | length 1237.1
  Top Layer w5: U10.J12@665.39,517.64 v3(675.2,507.79)
  Bottom Layer w3: v3(675.2,507.79) 757.78,425.21 757.78,253.42 769.19,242.01 769.19,240.65 907.48,102.36 v1(907.48,21.61)
  Bottom Layer w8: U12.19@698.82,-494.09 764.76,-494.09 907.48,-351.38 v1(907.48,21.61)
IO36: U10.F12
IO37: J6.2 U10.J13 | length 2631.9
  Top Layer w3: U10.J13@685.08,517.64 694.84,507.87 954.3,507.87 1082.57,636.15 1082.57,750.98 1118.99,787.4 v1(1163.39,787.4)
  Power w8: v1(1163.39,787.4) 1412.98,787.4 1717.87,1092.29 1994.73,1092.29 2310.56,776.46 2310.56,542.79 2437.6,415.75 J6.2@2586.52,415.75
IO38: U10.J11 U12.17 | length 1190.6
  Top Layer w5: v3(635.83,507.87) 645.59,517.64 U10.J11@645.71,517.64
  Bottom Layer w3: v3(635.83,507.87) 635.83,488.19 645.75,478.27 676.55,478.27 745.78,409.04 745.78,240.44 867.13,119.09 v1(867.13,21.61)
  Bottom Layer w8: U12.17@698.82,-454.72 750.98,-454.72 867.13,-338.58 v1(867.13,21.61)
IO39: J2.4 U10.F13 | length 2388.1
  Top Layer w3: U10.F13@685.08,576.69 694.5,567.27 954.3,567.27 1040.57,653.55 1040.57,830.71 1101.3,891.44 v1(1163.39,891.44)
  Power w8: v1(1163.39,891.44) 1470.34,891.44 1704.2,1125.29 2012.31,1125.29 2364.6,773 J2.4@2588.47,773
IO40: J6.5 U10.D11 | length 2883.3
  Top Layer w5: v3@636.81,624.96 U10.D11@645.71,616.06
  Power w8: v1(1164.37,682.09) 1354.33,682.09 1624.65,952.41 2087.94,952.41 2277.56,762.8 2277.56,275.16 2280.25,272.47 2280.25,244.09 2408.59,115.75 J6.5@2586.52,115.75
  Bottom Layer w3: v3@636.81,625 645.81,616 659.69,616 659.84,616.14 680.12,616.14 704.72,640.75 704.72,656.5 875,826.77 942.95,826.77 1087.64,682.09 v1(1164.37,682.09)
  other v3: 636,625.5
IO41: J2.1 U10.D13 | length 2282.9
  Top Layer w3: U10.D13@685.08,616.06 694.5,625.48 771.15,625.48 786.42,640.75 968.38,640.75 997.85,670.21 997.85,874.28 1112.86,989.29 v1(1163.39,989.29)
  Power w8: v1(1163.39,989.29) 1521.53,989.29 1690.53,1158.29 2025.98,1158.29 2111.27,1073 J2.1@2588.47,1073
IO42: J2.3 U10.F11 | length 2396.9
  Top Layer w3: U10.F11@645.71,576.69 655.13,586.11 953.34,586.11 1026.57,659.34 1026.57,852.81 1095.02,921.26 v1(1163.39,921.26)
  Power w8: v1(1163.39,921.26) 1484.61,921.26 1699.64,1136.29 2016.87,1136.29 2280.16,873 J2.3@2588.47,873
M0: R20.1 U10.P13 | length 69.7
  Top Layer w5: U10.P13@685.08,419.21 685.08,399.57 R20.1@720.47,364.17
M1: R22.1 U10.N9 | length 158.2
  Top Layer w3: R22.1@526.57,372.05 608.27,372.05 618.9,382.68 618.9,407.67 615.76,410.81 615.76,429.48 U10.N9@606.34,438.9
NetC2_1: C2.1 R2.1 R4.2 U1.1 | length 184
  Bottom Layer w8: U1.1@1488.7,315.47 1529.21,315.47 R4.2@1537.56,323.82 R2.1@1575.94,323.82 1597.71,345.58 1597.71,399.34 C2.1@1591.54,405.51
NetC10_2: C10.2 C11.1 R8.2 U7.6 | length 168.3
  Bottom Layer w10: C10.2@2027.56,76.54 2031.5,80.47 R8.2@2031.5,110.98 2042.32,121.81 C11.1@2042.32,152.32 2075.04,185.04 U7.6@2115.16,185.04
NetC15_2: C15.2 U12.33 X1.1 | length 283.1
  Bottom Layer w10: C15.2@211.61,-401.57 267.72,-401.57 X1.1@276.57,-410.43 340.55,-474.41 U12.33@464.57,-474.41
NetC16_2: C16.2 U12.32 X1.2 | length 264.1
  Bottom Layer w10: C16.2@210.63,-518.7 266.73,-518.7 X1.2@276.57,-508.86 291.34,-494.09 U12.32@464.57,-494.09
NetC17_2: C17.2 U12.22 X2.1 | length 208.2
  Bottom Layer w10: U12.22@650.59,-542.32 650.59,-563.98 667.32,-580.71 734.74,-580.71 765.75,-611.72 X2.1@765.75,-615.16 777.56,-603.35 C17.2@809.06,-603.35
NetC18_2: C18.2 U12.23 X2.3 | length 298.8
  Bottom Layer w10: U12.23@630.91,-542.32 630.91,-566.93 686.88,-622.91 686.88,-654.4 X2.3@714.57,-682.09 714.57,-689.96 744.09,-719.49 785.43,-719.49 C18.2@809.06,-695.87
NetC56_2: C56.2 U12.40 | length 68.5
  Bottom Layer w10: C56.2@431.1,-295.28 431.1,-325.79 441.93,-336.61 U12.40@464.57,-336.61
NetC62_1: C62.1 U17.3 Y1.3 | length 352.1
  Top Layer w8: U17.3@2897.64,572.83 v1(2897.64,606.3)
  Bottom Layer w8: C62.1@2687.99,558.07 2717.52,558.07 2734.25,541.34 Y1.3@2734.25,488.19 2756.89,488.19 2875,606.3 v1(2897.64,606.3)
NetC63_1: C63.1 U17.2 Y1.1 | length 172.8
  Top Layer w8: U17.2@2877.95,572.83 v1(2877.95,630.91)
  Bottom Layer w8: C63.1@2812.99,687.01 2812.99,641.73 Y1.1@2820.87,633.86 2823.82,630.91 v1(2877.95,630.91)
NetC64_1: C64.1 C65.1 L4.2 U17.4 | length 140.3
  Top Layer w8: U17.4@2917.32,572.83 2917.32,531.5 C65.1@2926.18,522.64 C64.1@2926.18,488.19 2926.18,438.98 L4.2@2928.15,437.01
NetC66_2: C66.2 C67.2 L5.2 U17.9 | length 143.6
  Top Layer w8: L5.2@3002.95,437.01 3000,439.96 C66.2@3000,489.17 C67.2@3000,524.61 3015.75,540.35 U17.9@3015.75,572.83
NetC78_1: C78.1 C79.2 L6.2 L7.2 | length 124.6
  Bottom Layer w14.25: L7.2@599.9,-824.8 599.9,-866.63 C79.2@601.38,-868.11 ; L7.2@600.89,-824.8 600.89,-787.78 599.9,-786.8 C78.1@602.25,-784.45 639.76,-784.45 L6.2@640.75,-785.43
NetC78_2: C78.2 U12.25 | length 209.7
  Bottom Layer w8: 591.55,-623.22 U12.25@591.54,-542.32
  Bottom Layer w14.25: 593.25,-623.92 602.25,-632.92 C78.2@602.25,-749.02
NetC79_1: C79.1 C80.1 C81.2 L8.2 | length 92.5
  Bottom Layer w14.25: C81.2@530.51,-900.59 C79.1@594.49,-900.59 ; C80.1@601.38,-929.13 C79.1@601.38,-900.59
NetC83_1: C83.1 C84.1 L7.1 L8.1 | length 126.2
  Bottom Layer w14.25: C84.1@516.73,-784.45 C83.1@561.15,-784.45 563.48,-786.78 563.48,-863.19 L8.1@562.01,-864.67
NetC83_2: C83.2 U12.26 | length 211.1
  Bottom Layer w8: 571.85,-623.12 U12.26@571.85,-542.32
  Bottom Layer w14.25: C83.2@560.17,-748.03 C83.2@561.15,-749.02 561.15,-632.82 570.15,-623.82
NetC85_2: C85.2 J1.1 | length 69.3
  Bottom Layer w10: J1.1@567.91,2210.63 568.9,2211.61 C85.2@636.81,2211.61
NetC90_2: C90.2 FL1.4 | length 48.2
  Bottom Layer w11.81: C90.2@-730.32,755.91 FL1.4@-730.32,804.13
NetDS1_1: DS1.1 R7.1 | length 52.4
  Bottom Layer w10: DS1.1@1978.35,217.52 1978.35,249.02 R7.1@1993.11,263.78
NetDS1_2: DS1.2 U7.7 | length 75.2
  Bottom Layer w10: DS1.2@2045.28,217.52 2058.07,204.72 U7.7@2115.16,204.72
NetDS2_1: DS2.1 R6.1 | length 77.4
  Bottom Layer w8: R6.1@2352.36,311.02 2368.11,295.28 DS2.1@2368.11,256.89 ; DS2.1@2369.09,240.16 DS2.1@2369.09,256.89
NetDS2_2: DS2.2 U7.3 | length 77.4
  Bottom Layer w8: U7.3@2231.3,224.41 2286.42,224.41 DS2.2@2302.16,240.16
NetDS3_1: DS3.1 R5.1 | length 53.8
  Bottom Layer w8: R5.1@2353.35,138.78 2369.09,154.53 DS3.1@2369.09,186.02
NetDS3_2: DS3.2 U7.4 | length 78.6
  Bottom Layer w8: U7.4@2231.3,204.72 2283.46,204.72 DS3.2@2302.16,186.02
NetDS4_2: DS4.2 R35.1 | length 69.6
  Top Layer w5: DS4.2@875.99,345.47 884.84,336.61 R35.1@941.93,336.61
NetDS5_2: DS5.2 R36.1 | length 62.4
  Top Layer w5: R36.1@874.02,254.76 874.02,193.74 DS5.2@875,192.75
NetJ4_2: J4.2 R14.1 U16.15 | length 258.6
  Top Layer w8: J4.2@3248.03,835.24 3330.22,917.42 U16.15@3330.22,974.41 3330.22,1055.61 R14.1@3329.72,1056.1 ; R14.1@3333.17,1052.66 R14.1@3335.63,1055.12
NetL1_1: L1.1 U1.6 | length 177.1
  Bottom Layer w10: U1.6@1372.56,236.73 1349.92,236.73 1326.77,213.58 1326.77,153.54 1349.41,130.91 L1.1@1379.1,130.91
NetL2_1: L2.1 U1.10 | length 183.9
  Bottom Layer w10: U1.10@1372.56,315.47 1357.76,315.47 1324.8,348.43 1324.8,408.46 1344.49,428.15 L2.1@1379.1,428.15
NetL3_1: L3.1 U8.2 | length 94.7
  Bottom Layer w10: L3.1@1455.29,771.23 1475.89,750.64 U8.2@1475.89,685.04
NetL3_2: L3.2 U8.4 | length 179.5
  Bottom Layer w8: U8.4@1515.26,685.04 1515.26,831.2 L3.2@1538.81,854.75
NetR1_1: R1.1 R3.2 U1.5 | length 124.5
  Bottom Layer w8: U1.5@1488.7,236.73 1508.35,236.73 R1.1@1535.43,209.65 1535.43,148.62 R3.2@1539.37,144.68
NetR9_1: R9.1 R10.1 U7.8 | length 209.2
  Top Layer w8: v1(2082.68,224.41) 2082.68,174.21 v1(2133.86,123.03)
  Bottom Layer w8: v1(2133.86,123.03) R9.1@2155.51,123.03 R10.1@2155.51,90.55
  Bottom Layer w10: v1(2082.68,224.41) U7.8@2115.16,224.41
NetR11_1: R11.1 R12.2 U8.10 | length 114.4
  Bottom Layer w10: R11.1@1419.29,644.69 1419.29,630.91 1456.69,593.5 1456.69,586.61 1456.69,554.13 R12.2@1450.79,548.23
NetR13_2: R13.2 U15.5 | length 65.4
  Bottom Layer w8: R13.2@2891.73,481.54 2892.87,482.68 U15.5@2956.69,482.68
NetR15_1: R15.1 U17.6 | length 50.7
  Top Layer w8: U17.6@2956.69,572.83 2956.69,530.51 R15.1@2962.6,524.61
NetR16_1: R16.1 U14.5 U17.63 | length 159.7
  Top Layer w8: U14.5@2727.36,638.78 2728.35,637.8 R16.1@2728.35,596.46 2736.22,588.58 2775.59,588.58 2810.04,623.03 U17.63@2827.76,623.03
NetR31_2: R31.2 U10.B13 | length 158.6
  Top Layer w3: U10.B13@685.08,655.43 694.5,664.85 712.1,664.85 790.36,743.11 R31.2@790.36,760.16
NetR32_2: R32.2 U10.A13 | length 178
  Top Layer w5: U10.A13@685.08,675.12 770.79,760.83 770.79,789.96 R32.2@790.35,809.53
NetR33_2: R33.2 U10.C14 | length 96.2
  Top Layer w5: U10.C14@704.76,635.75 764.69,635.75 R33.2@790.36,661.42
NetR34_2: R34.2 U10.B14 | length 108.5
  Top Layer w5: U10.B14@704.76,655.43 723.35,655.43 778.7,710.79 R34.2@790.36,710.79
NetR37_1: R37.1 U10.N2 | length 86.3
  Top Layer w3: R37.1@462.6,363.19 462.6,397.64 478.35,413.39 478.35,429.09 U10.N2@468.54,438.9
NetR38_1: R38.1 R39.2 U11.B5 | length 162
  Top Layer w5: U11.B5@502.95,933.07 517.72,947.83 517.72,975.39 488.19,1004.92 R39.2@488.19,1041.34 R38.1@523.62,1041.34
NetR40_1: R40.1 U12.30 | length 122
  Bottom Layer w10: R40.1@414.37,-609.25 414.37,-582.68 454.72,-542.32 U12.30@493.11,-542.32
NetR41_1: R41.1 U14.4 U17.62 | length 208.5
  Top Layer w8: U14.4@2689.96,638.78 2689.96,645.73 2714.34,670.1 2781.67,670.1 2809.06,642.72 U17.62@2827.76,642.72
  Top Layer w10: R41.1@2689.96,596.46 U14.4@2689.96,638.78
NetR42_1: R42.1 R43.1 U14.1 | length 93
  Top Layer w8: R42.1@2747.05,818.9 R43.1@2747.05,782.48 2764.76,764.76 U14.1@2764.76,733.27
NetR43_2: R43.2 U14.3 U17.61 | length 242.7
  Top Layer w8: R43.2@2707.68,782.48 2689.96,764.76 U14.3@2689.96,733.27 2689.96,700.79 2709.65,681.1 2787.4,681.1 2806.1,662.4 U17.61@2827.76,662.4
NetR46_1: R46.1 U5.30 | length 88.5
  Top Layer w10: R46.1@479.33,2019.68 479.33,2051.18 v4(486.22,2058.07)
  Bottom Layer w10: v4(486.22,2058.07) U5.30@486.22,2105.32
NetR46_2: R46.2 U5.29 | length 88.7
  Top Layer w10: v4(438.98,2059.06) 443.9,2054.13 R46.2@443.9,2019.68
  Bottom Layer w10: v4(438.98,2059.06) U5.29@438.98,2105.32 U5.29@438.98,2106.3
NetR47_1: R47.1 U5.28 | length 97.9
  Top Layer w10: v4(326.77,2032.48) 332.68,2026.57 R47.1@375,2026.57
  Bottom Layer w10: v4(326.77,2032.48) U5.28@374.02,2032.48
NetR47_2: R47.2 U5.27 | length 96.9
  Top Layer w10: v4(327.76,1985.24) 333.66,1991.14 R47.2@375,1991.14
  Bottom Layer w10: v4(327.76,1985.24) U5.27@375,1985.24
NetU17_14: U17.14
OSC_50M: U10.N8 X3.3 | length 250.1
  Top Layer w5: U10.N8@586.65,438.9 586.65,438.48 v3(596,429.13) ; X3.3@638.78,288.39 638.78,276.57 647.64,267.72 v1(660.43,267.72) ; X3.3@638.78,290.35 638.78,289.37 X3.3@639.27,288.88
  Bottom Layer w5: v3(596,429.13) 596,395.14 606.31,384.83 622.59,384.83 635.83,371.59 635.83,292.32 v1(660.43,267.72)
PIO2: C89.2 R51.2 R52.2 U18.8 U19.27 | length 808.4
  Top Layer w8: v2(-691.93,207.68) -468.51,431.1 v2(-468.51,550.19)
  Bottom Layer w8: v2(-691.93,207.68) -691.14,208.46 U18.8@-632.87,208.46 -542.52,208.46 -513.78,237.2 C89.2@-513.78,259.84 -513.78,309.05 R52.2@-511.81,311.02 R51.2@-511.81,359.25 ; U19.27@-497.05,598.42 -497.05,581.69 -468.51,553.15 v2(-468.51,550.19)
PROGRAM_N: R26.1 U10.N1 | length 151.8
  Top Layer w5: R26.1@331.69,355.32 339.66,355.32 361.9,377.55 387.51,377.55 U10.N1@448.86,438.9
RF_ANT: C85.1 U5.35 | length 153.9
  Bottom Layer w10: C85.1@667.83,2210.87 700.81,2210.87 cw(c700.81,2188.74) 722.95,2188.74 U5.35@722.95,2102.61
RST_N: C45.1 R17.2 SW5.1 U10.D14 | length 4516.6
  Top Layer w5: U10.D14@704.76,616.06 776.5,616.06 786.42,625.98 v1(875.98,625.98) 963.52,625.98 1004.85,667.31 1004.85,871.38 1105.63,972.17 v1(1144.68,972.17)
  Top Layer w8: v1(2667.32,154.53) 2766.73,55.12 3419.29,55.12 v1(3451.77,87.6)
  Power w8: v1(1144.68,972.17) 1126.97,989.88 1126.97,1061.02 1150.12,1084.18 1600.86,1084.18 1685.97,1169.29 2570.87,1169.29 2637.8,1102.36 2637.8,184.06 v1(2667.32,154.53)
  Bottom Layer w8: v1(875.98,625.98) C45.1@875.98,601.38 877.95,603.35 R17.2@909.45,603.35 ; SW5.1@3345.47,275.59 SW5.1@3358.27,275.59 ; SW5.1@3357.28,274.61 SW5.1@3358.27,275.59 ; v1(3451.77,87.6) 3451.77,235.24 3411.42,275.59 SW5.1@3358.27,275.59
SCL: R52.1 U18.6 U19.28 | length 556.4
  Top Layer w7.87: v2(-690.94,308.86) -633.07,308.86 -492.13,449.8 v2(-492.13,550.19)
  Bottom Layer w7.87: U19.28@-516.73,598.42 -516.73,574.9 -492.13,550.3 v2(-492.13,550.19)
  Bottom Layer w10: v2@-690.55,308.46 U18.6@-632.87,308.46 -553.74,308.46 R52.1@-551.18,311.02
SDA: R51.1 U18.5 U19.29 | length 508.6
  Top Layer w7.87: v2(-690.94,358.86) -608.66,358.86 -515.75,451.77 v2(-515.75,550.19)
  Bottom Layer w7.87: U19.29@-536.42,598.42 -536.42,570.86 v2(-515.75,550.19)
  Bottom Layer w10: v2@-690.55,358.46 U18.5@-632.87,358.46 -551.97,358.46 R51.1@-551.18,359.25
SELECT: U16.1 U17.21 | length 209.1
  Top Layer w8: U17.21@3184.06,682.09 3241.14,682.09 3250.98,691.93 3285.43,691.93 3305.22,711.71 U16.1@3305.22,787.4
SMPS_LX: L9.1 U19.31 | length 69.8
  Bottom Layer w7.87: U19.31@-575.79,598.42 -575.79,538.39 L9.1@-568.9,531.5
SOFT_TCK: J8.1 U10.G14 U16.10 | length 4012
  Top Layer w5: U10.G14@704.76,557.01 706,558.24 955.17,558.24 1047.57,650.65 1047.57,812.99 1105.35,870.77 v1(1144.68,870.77)
  Top Layer w8: U16.10@3455.22,974.41 v1(3455.22,1044.29) 3475.39,1044.29 3545.28,974.41 3545.28,603.25 J8.1@3632.78,515.75
  Bottom Layer w8: v1(1144.68,870.77) 1102.36,913.09 1102.36,1076.2 1149.94,1123.77 1550.94,1123.77 1592.91,1165.74 3132.89,1165.74 3198.04,1100.6 3398.91,1100.6 v1(3455.22,1044.29)
SOFT_TDI: J8.2 U10.H14 U16.6 | length 3828
  Top Layer w5: U10.H14@704.76,537.32 954.05,537.32 1061.57,644.85 1061.57,787.4 1111.14,836.97 v1(1144.68,836.97)
  Top Layer w8: v1(3330.71,703.74) 3409.45,703.74 v1(3431.1,725.39) 3430.22,726.28 U16.6@3430.22,787.4
  Bottom Layer w8: v1(1144.68,836.97) 1380.12,836.97 1631.89,1088.74 2331.54,1088.74 2394.86,1025.42 2768.53,1025.42 2829.72,1086.61 3056.29,1086.61 3330.71,812.2 v1(3330.71,703.74) ; v1(3431.1,725.39) 3431.1,529.53 3544.88,415.75 J8.2@3632.78,415.75
SOFT_TDO: J8.3 U10.E14 U16.13 | length 4219.5
  Top Layer w5: U10.E14@704.76,596.38 953.71,596.38 1018.85,661.52 1018.85,854.98 1102.23,938.37 v1(1144.68,938.37)
  Top Layer w8: U16.13@3380.22,974.41 v1(3380.22,1044.98) 3398.23,1062.99 3478.35,1062.99 3564.96,976.38 3564.96,661.42 3687.01,539.37 3687.01,369.98 J8.3@3632.78,315.75
  Bottom Layer w8: v1(1144.68,938.37) 1114.17,968.88 1114.17,1072.45 1154.5,1112.77 1562.59,1112.77 1604.55,1154.74 3128.34,1154.74 3193.48,1089.6 3335.6,1089.6 v1(3380.22,1044.98)
SOFT_TMS: J8.4 U10.F14 U16.3 | length 3920.1
  Top Layer w5: U10.F14@704.76,576.69 953.82,576.69 1033.57,656.44 1033.57,849.91 1088.23,904.57 v1(1144.68,904.57)
  Top Layer w8: v1@3355.22,725.49 U16.3@3355.22,787.4
  Bottom Layer w8: v1(1144.68,904.57) 1146.06,905.94 1433.53,905.94 1627.33,1099.74 2336.09,1099.74 2399.41,1036.42 2763.97,1036.42 2827.29,1099.74 3058.72,1099.74 3355.32,803.15 v1(3355.32,725.39) 3355.32,576.77 3509.84,422.24 3509.84,338.68 J8.4@3632.78,215.75
SPI_CLK: TP2.1 U19.18 | length 228.9
  Bottom Layer w7.87: U19.18@-425.2,749.02 -317.91,749.02 -261.81,692.91 TP2.1@-261.81,650.59
SPI_CLK1: R21.1 R23.2 U9.6 U10.N13 | length 495.9
  Top Layer w3: v1(580.71,338.58) 581.68,339.56 619.08,339.56 675.66,396.13 675.66,429.48 U10.N13@685.08,438.9
  Top Layer w5: R21.1@429.13,231.3 R23.2@478.35,231.3 ; v1(479.33,205.71) 478.35,206.69 R23.2@478.35,231.3 ; U9.6@511.81,290.35 499.02,290.35 478.35,269.68 R23.2@478.35,231.3
  Power w5: v1(479.33,205.71) 479.33,237.2 v1(580.71,338.58)
SPI_CLK2: U2.4 U10.L2 | length 309.4
  Top Layer w3: v1(351.38,418.31) 389.15,418.31 438.85,468 458.28,468 U10.L2@468.54,478.27
  Top Layer w5: v1(221.46,384.84) U2.4@221.46,408.46
  Bottom Layer w5: v1(221.46,384.84) 317.91,384.84 v1(351.38,418.31)
SPI_CS: TP3.1 U19.19 | length 297.7
  Bottom Layer w7.87: U19.19@-425.2,729.33 -348.43,729.33 -295.28,676.18 -295.28,577.76 TP3.1@-261.81,544.29
SPI_DIN: R18.2 R19.1 U9.5 | length 77.2
  Top Layer w5: U9.5@511.81,270.67 538.39,270.67 R19.1@551.18,283.46 R18.2@551.18,250.98
SPI_DIN1_R: R19.2 U10.N11 | length 193.8
  Top Layer w3: R19.2@551.18,322.83 551.18,341.48 566.88,357.17 619.04,357.17 655.35,393.49 655.35,429.25 U10.N11@645.71,438.9
SPI_DIN2: U2.7 U10.M1 | length 325.3
  Top Layer w3: v1(365.16,403.54) 382.87,403.54 437.91,458.58 U10.M1@448.86,458.58
  Top Layer w5: U2.7@182.09,349.41 v1(206.69,349.41)
  Bottom Layer w5: v1(206.69,349.41) 333.66,349.41 365.16,380.91 v1(365.16,403.54)
SPI_DOUT: U9.2 U10.P11 | length 312.2
  Top Layer w5: U9.2@393.7,310.04 419.39,310.04 450.88,341.54 541.34,341.54 563.98,364.17 616.14,364.17 645.71,393.74 U10.P11@645.71,419.21
SPI_DOUT2: U2.6 U10.M2 | length 323.5
  Top Layer w3: v1(351.38,388.78) 382.87,388.78 442.91,448.82 458.78,448.82 U10.M2@468.54,458.58
  Top Layer w5: U2.6@182.09,369.09 v1(206.69,369.09)
  Bottom Layer w5: v1(206.69,369.09) 331.69,369.09 v1(351.38,388.78)
SPI_IN: TP4.1 U19.20 | length 121.3
  Bottom Layer w7.87: U19.20@-425.2,709.65 -369.09,709.65 -354.33,694.88 TP4.1@-354.33,650.59
SPI_OUT: TP5.1 U19.22 | length 170.3
  Bottom Layer w7.87: U19.22@-425.2,670.28 -399.61,670.28 -385.83,656.5 -385.83,575.79 TP5.1@-354.33,544.29
SPI_PIO: TP1.1 U19.26 | length 252.4
  Bottom Layer w7.87: U19.26@-477.36,598.42 -477.36,580.71 -468.5,571.85 -404.53,571.85 -385.83,553.15 -385.83,464.57 TP1.1@-355.32,434.06
SRAM_CS_N: R39.1 U10.G1 | length 517
  Top Layer w5: R39.1@448.82,1041.34 448.82,946.9 409.34,907.43 409.34,596.53 U10.G1@448.86,557.01
SRAM_LB_N: U10.B4 U11.A1 | length 173.8
  Top Layer w3: U11.A1@473.43,814.96 473.43,796.26 498.49,771.19 498.49,664.85 U10.B4@507.91,655.43
SRAM_OE_N: U10.A3 U11.A2 | length 187
  Top Layer w3: U11.A2@473.43,844.49 459.65,830.71 459.65,796.26 488.23,767.68 U10.A3@488.23,675.12 U10.A3@488.19,675.16
SRAM_UB_N: U10.A5 U11.B2 | length 179.6
  Top Layer w3: U11.B2@502.95,844.49 517.72,829.72 517.72,796.26 527.6,786.38 U10.A5@527.6,675.12
SRAM_WE_N: U10.B11 U11.G5 | length 359.6
  Top Layer w3: U10.B11@645.71,655.43 655.51,665.24 655.51,693.9 735.24,773.62 735.24,865.16 682.09,918.31 665.35,918.31 U11.G5@650.59,933.07
STATUS: DS4.1 U10.M13 | length 191.3
  Top Layer w3: U10.M13@685.08,458.58 695.34,448.32 708.67,448.32 746.17,410.81 746.17,375.87 776.57,345.47 DS4.1@809.06,345.47